# Altium PCB NeptuneSense_outdoor_station.PcbDoc
Units mm, origin at the board's own origin, x right, y up, seen from the top; angles counter-clockwise.
Board outline 67.06 x 79.25 mm, 2 copper layers (Top Layer, Bottom Layer); 79 components, 44 nets, 263 pads, 48 vias.
Unrouted connection lines stored in the file: 17.
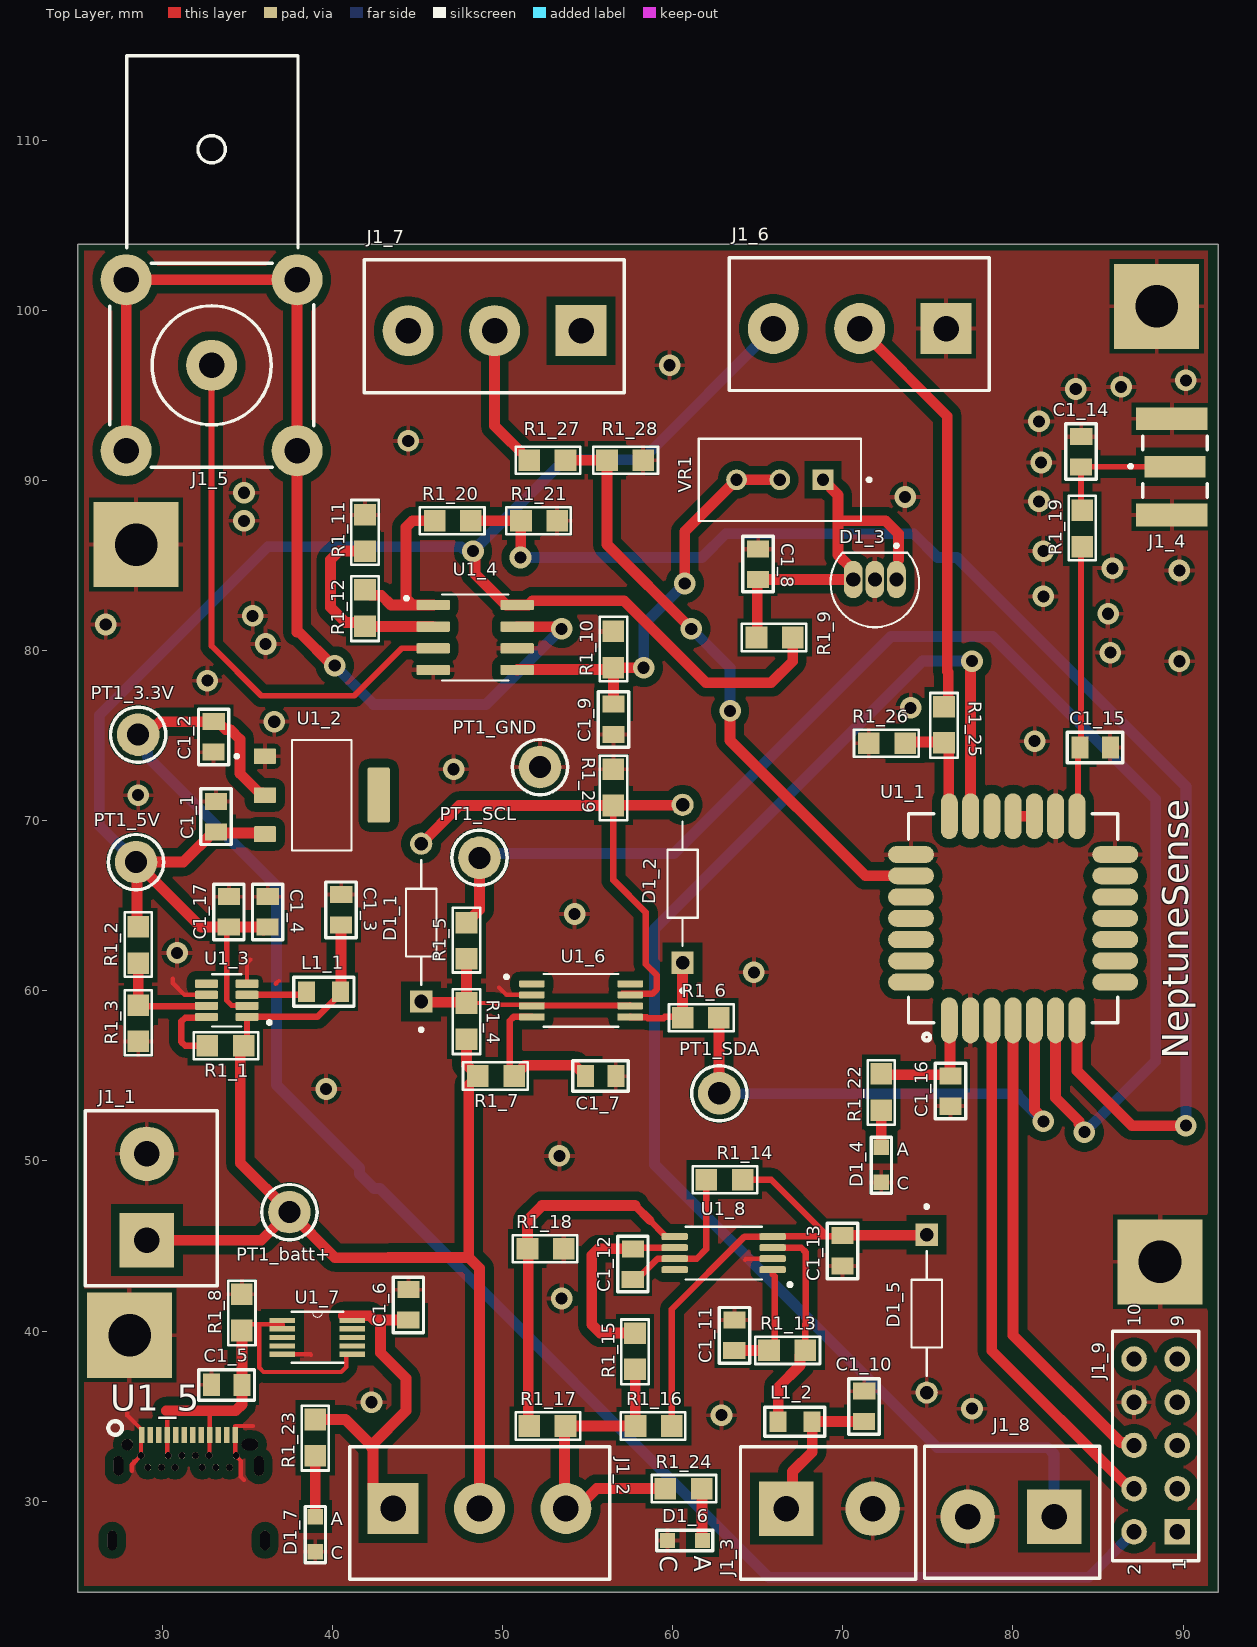
[diagram p0: Top Layer view]
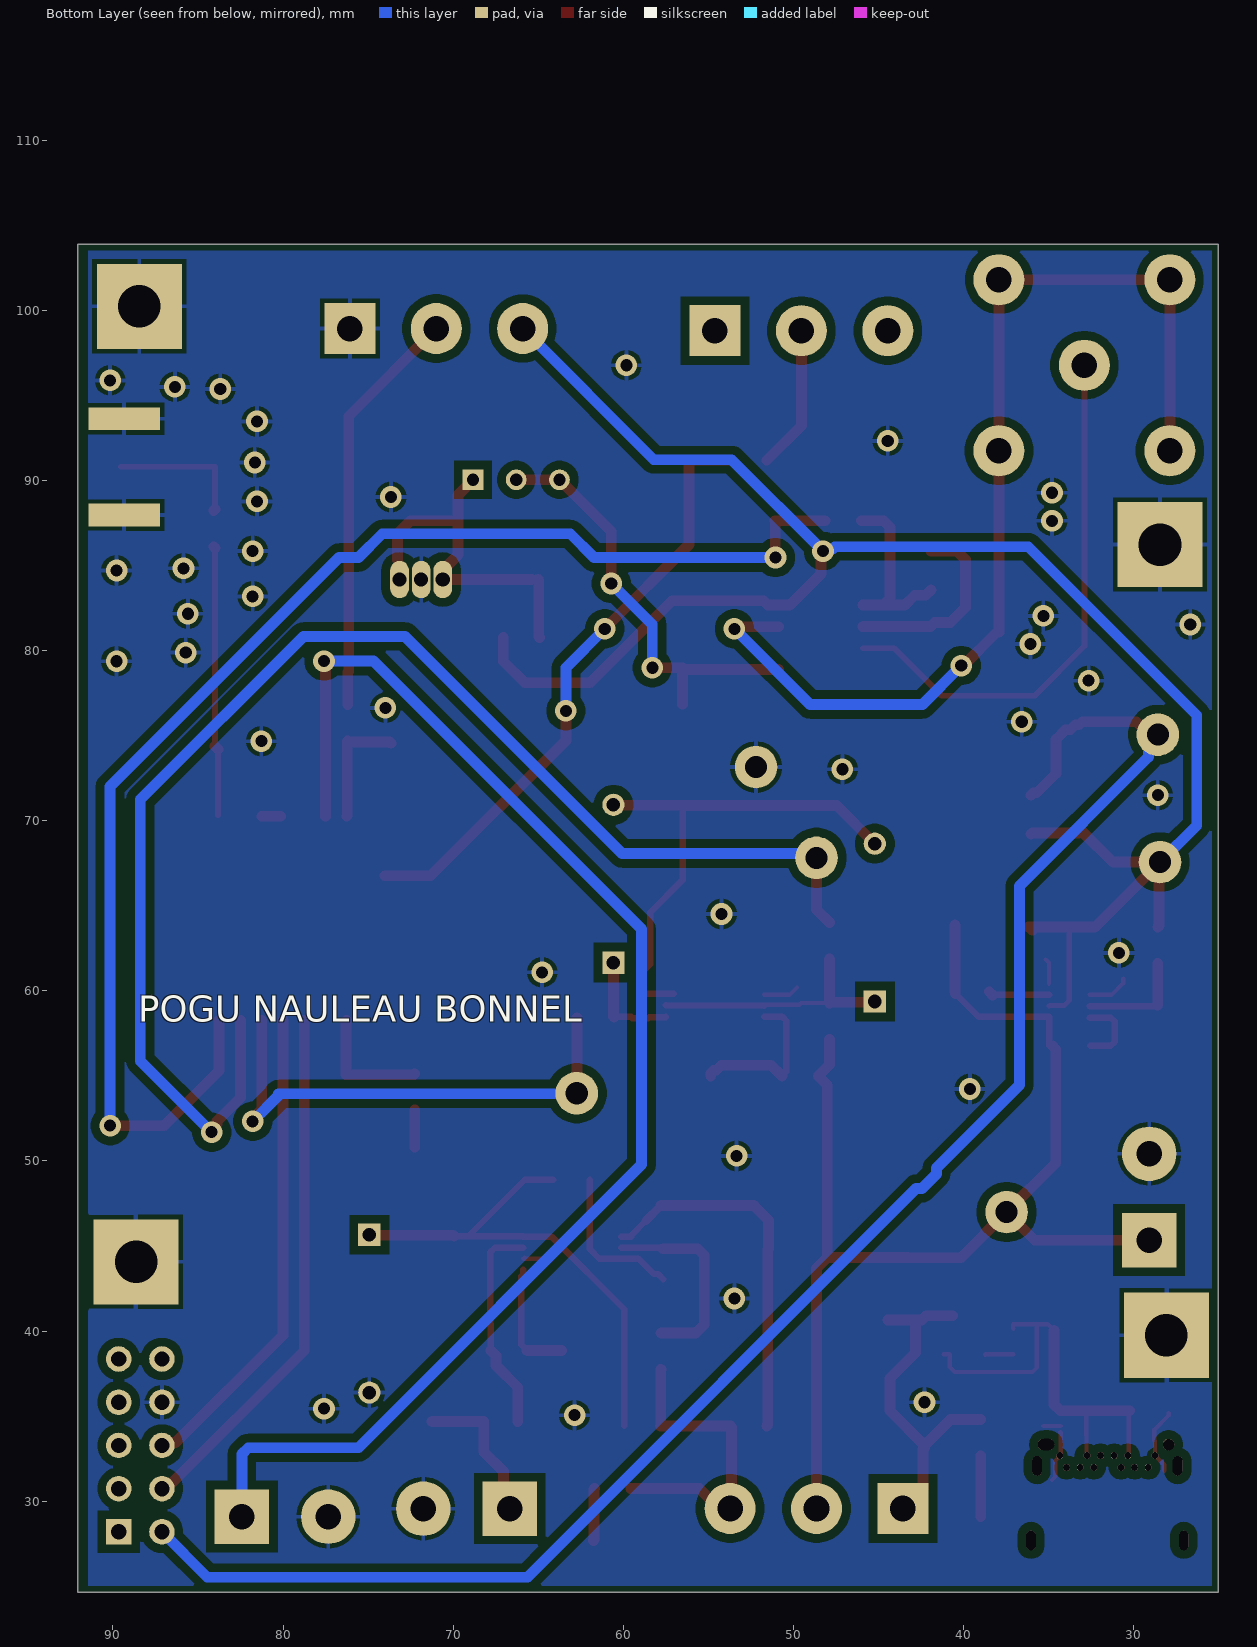
[diagram p1: Bottom Layer view, seen from below]
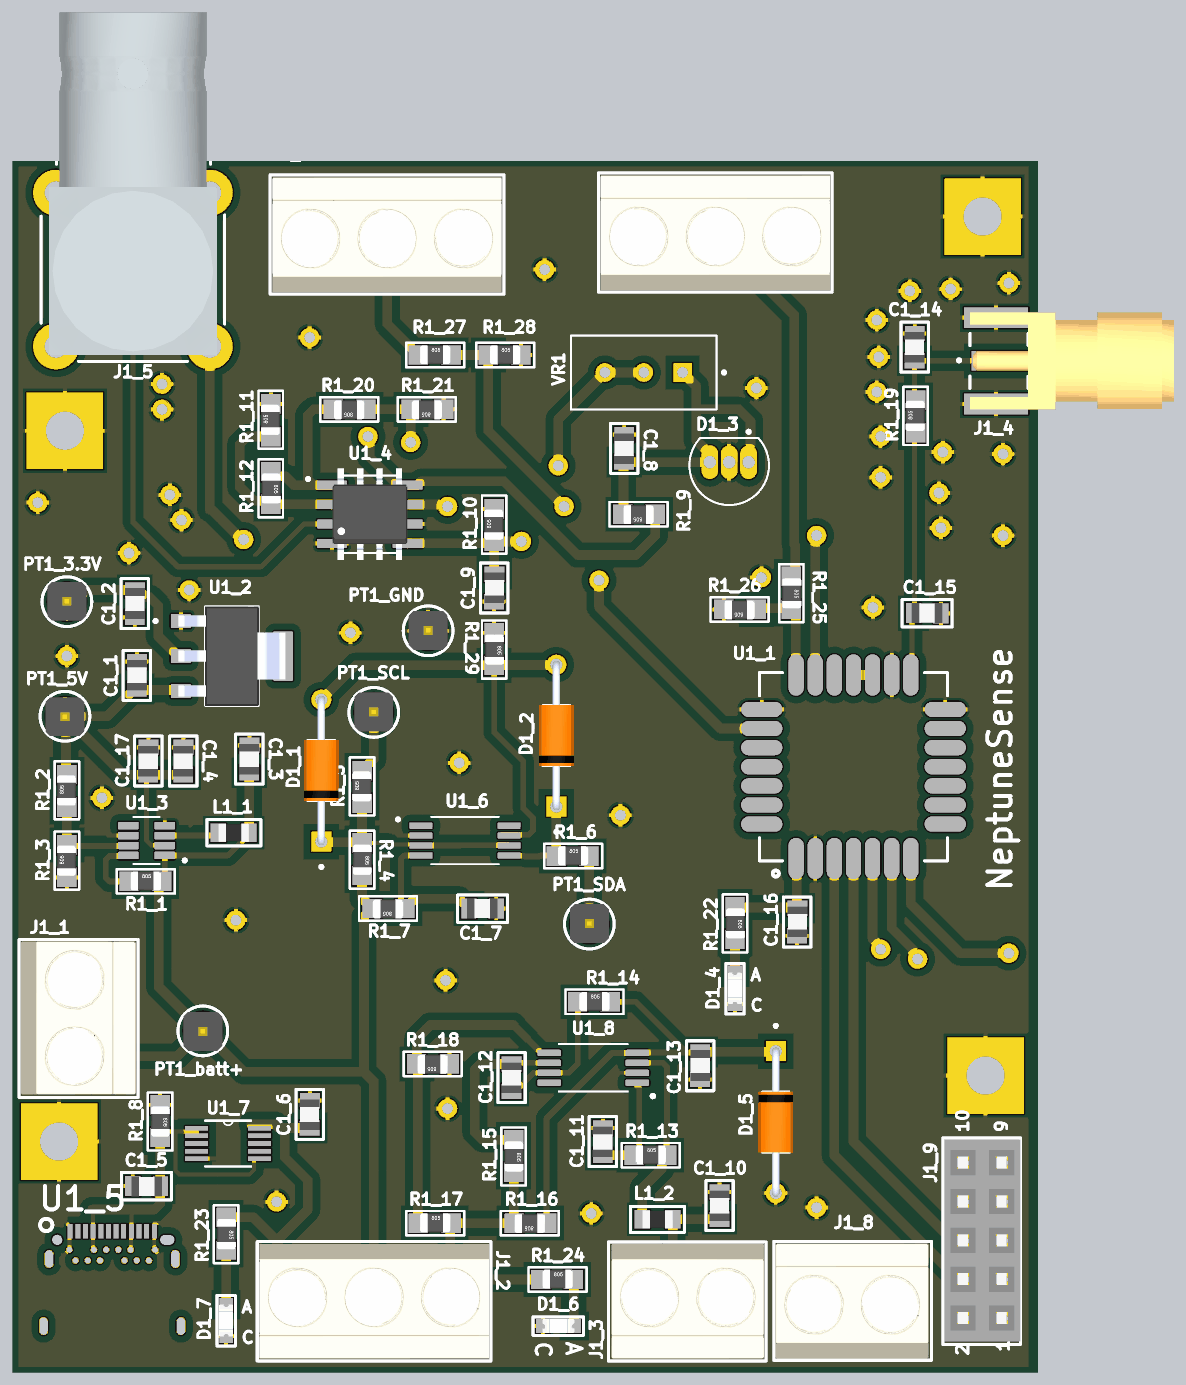
[diagram p2: 3D render of the assembled board from above, using the file's embedded part models]

## Layer stack, top to bottom
Top Solder: solder mask 0.0102, Solder Resist, Dk 3.5
Top Layer: signal copper 0.0356
Dielectric 1: dielectric 0.32, FR-4, Dk 4.8
Bottom Layer: signal copper 0.0356
Bottom Solder: solder mask 0.0102, Solder Resist, Dk 3.5

## Board outline
25.019,24.638 25.019,103.886 92.075,103.886 92.075,24.638

## Design rules (kind name [scope] priority, off if disabled: settings)
Clearance [All] p1: gap=0.505 ignorepadtopadclearanceinfootprint=FALSE except(0: Arc-Text Track-Text SMDPad-Text THPad-Text Via-Text Fill-Text Poly-Text Region-Text Text-Text Text-Hole; 0.15: Arc-SMDPad Arc-THPad Arc-Hole Track-SMDPad Track-THPad Track-Hole SMDPad-SMDPad SMDPad-THPad SMDPad-Hole THPad-THPad THPad-Hole Via-Hole Fill-Hole Poly-Hole Region-Hole; 0.254: Arc-Arc Arc-Track Arc-Via Track-Track Track-Via SMDPad-Via THPad-Via Via-Via)
PolygonConnect [All] p1: connectstyle=Relief reliefconductorwidth=0.254 reliefentries=4 polygonreliefangle="90 Angle" airgapwidth=0.254
RoutingVias [All] p1: holewidth=0.711 width=1.27 viastyle="Through Hole" minholewidth=0.711 minwidth=1.27 maxholewidth=0.711 maxwidth=1.27
SolderMaskExpansion [All] p1: expansion=0.102 istentingtop=FALSE
Width [All] p1: maxlimit=0.762 minlimit=0.254 preferedwidth=0.635
30 further rules are at their usual default settings.

## Components (designator, comment, footprint, x,y, rotation, side; value= is the part's Value field where it differs from the comment)
C1_1 "CMS_0805" CONDENSATEUR_CMS_0805 33.147,69.342 r90 top value=10µF
C1_2 "CMS_0805" CONDENSATEUR_CMS_0805 33.01,74.029 r90 top value=2µnF
C1_3 "CMS_0805" CONDENSATEUR_CMS_0805 40.513,65.659 r270 top value=10µF
C1_4 "CMS_0805" CONDENSATEUR_CMS_0805 36.195,65.532 r270 top value=10µF
C1_5 "CMS_0805" CONDENSATEUR_CMS_0805 32.881,36.84 r0 top value=1µF
C1_6 "CMS_0805" CONDENSATEUR_CMS_0805 44.46,42.43 r270 top value=1µF
C1_7 "CMS_0805" CONDENSATEUR_CMS_0805 56.654,54.981 r180 top value=0,1µF
C1_8 "CMS_0805" CONDENSATEUR_CMS_0805 65.024,85.979 r270 top value=0,1µF
C1_9 "CMS_0805" CONDENSATEUR_CMS_0805 56.515,75.057 r90 top value=0,1µF
C1_10 "CMS_0805" CONDENSATEUR_CMS_0805 71.257,36.461 r270 top value=10µF
C1_11 "CMS_0805" CONDENSATEUR_CMS_0805 63.627,40.64 r270 top value="100 nF"
C1_12 "CMS_0805" CONDENSATEUR_CMS_0805 57.658,44.831 r270 top value=1uF
C1_13 "CMS_0805" CONDENSATEUR_CMS_0805 69.977,43.815 r90 top value=4,7uF
C1_14 "CMS_0805" CONDENSATEUR_CMS_0805 84.015,92.595 r270 top net-tie value=DNF
C1_15 "CMS_0805" CONDENSATEUR_CMS_0805 85.725,74.295 r180 top value=DNF
C1_16 "CMS_0805" CONDENSATEUR_CMS_0805 76.327,53.213 r90 top value=4,7µF
C1_17 "CMS_0805" CONDENSATEUR_CMS_0805 33.909,65.532 r270 top value=1µF
D1_1 "BZX55C3V3" DIOAD928W47L399D179 45.212,64.008 r90 top
D1_2 "BZX55C3V3" DIOAD928W47L399D179 60.579,66.294 r90 top
D1_3 "TL431ILP" TO92127P520H660-3 71.882,83.566 r180 top
D1_4 "LED_CMS_0805" LED_CMS_0805 72.263,50.8 r0 top
D1_5 "BZX55C3V3" DIOAD928W47L399D179 74.93,41.021 r270 top
D1_6 "LED_CMS_0805" LED_CMS_0805 61.753,27.686 r270 top
D1_7 "LED_CMS_0805" LED_CMS_0805 38.989,29.083 r0 top
J1_1 "BORNIER2_DROIT_A VIS" BORNIER2_A_VIS 29.083,45.339 r90 top
J1_2 "BORNIER3_DROIT_A VIS" BORNIER3_A_VIS 43.561,29.565 r0 top
J1_3 "BORNIER2_DROIT_A VIS" BORNIER2_A_VIS 66.675,29.555 r0 top
J1_4 "SMA-J-P-H-ST-EM1" SAMTEC_SMA-J-P-H-ST-EM1 89.535,90.805 r90 top
J1_5 "BNC_COUDEE_CARREE_10.1" BNC_C_CAR_10.1 32.893,96.774 r0 top
J1_6 "BORNIER3_DROIT_A VIS" BORNIER3_A_VIS 76.073,98.933 r180 top
J1_7 "BORNIER3_DROIT_A VIS" BORNIER3_A_VIS 54.61,98.806 r180 top
J1_8 "BORNIER2_DROIT_A VIS" BORNIER2_A_VIS 82.423,29.083 r180 top
J1_9 "BARRETTE_5 CONTACTS_2 RANGEES_FEMELLE_DROITE" BARRETTE_5X2_F_D 89.662,28.194 r90 top
L1_1 "INDUCTANCE_CMS_0805" INDUCTANCE_CMS_0805 38.481,59.944 r0 top value=1µH
L1_2 "INDUCTANCE_CMS_0805" INDUCTANCE_CMS_0805 68.199,34.671 r180 top value=10µH
PT1_3.3V "POINT_TEST" POINT_TEST 28.575,75.057 r90 top
PT1_5V "POINT_TEST" POINT_TEST 28.448,67.564 r270 top
PT1_batt+ "POINT_TEST" POINT_TEST 37.465,46.99 r270 top
PT1_GND "POINT_TEST" POINT_TEST 52.197,73.152 r90 top
PT1_SCL "POINT_TEST" POINT_TEST 48.641,67.818 r90 top
PT1_SDA "POINT_TEST" POINT_TEST 62.738,53.975 r90 top
R1_1 "RESISTANCE_CMS_0805" RESISTANCE_CMS_0805 32.639,56.769 r0 top value=100K
R1_2 "RESISTANCE_CMS_0805" RESISTANCE_CMS_0805 28.575,61.62 r90 top value=1M
R1_3 "RESISTANCE_CMS_0805" RESISTANCE_CMS_0805 28.575,57.023 r90 top value=137K
R1_4 "RESISTANCE_CMS_0805" RESISTANCE_CMS_0805 47.879,59.284 r270 top value=1K
R1_5 "RESISTANCE_CMS_0805" RESISTANCE_CMS_0805 47.879,61.874 r90 top value=150
R1_6 "RESISTANCE_CMS_0805" RESISTANCE_CMS_0805 60.579,58.42 r0 top value=150
R1_7 "RESISTANCE_CMS_0805" RESISTANCE_CMS_0805 50.673,54.991 r180 top value=500
R1_8 "RESISTANCE_CMS_0805" RESISTANCE_CMS_0805 34.671,42.164 r270 top value=1K
R1_9 "RESISTANCE_CMS_0805" RESISTANCE_CMS_0805 67.056,80.772 r180 top value=1k
R1_10 "RESISTANCE_CMS_0805" RESISTANCE_CMS_0805 56.515,78.994 r90 top value=10k
R1_11 "RESISTANCE_CMS_0805" RESISTANCE_CMS_0805 41.91,85.852 r90 top value=10k
R1_12 "RESISTANCE_CMS_0805" RESISTANCE_CMS_0805 41.91,83.566 r270 top value=20k
R1_13 "RESISTANCE_CMS_0805" RESISTANCE_CMS_0805 65.659,38.862 r0 top value=1k
R1_14 "RESISTANCE_CMS_0805" RESISTANCE_CMS_0805 61.976,48.895 r0 top value=1k
R1_15 "RESISTANCE_CMS_0805" RESISTANCE_CMS_0805 57.785,39.878 r270 top value=1k
R1_16 "RESISTANCE_CMS_0805" RESISTANCE_CMS_0805 59.944,34.417 r180 top value=10m
R1_17 "RESISTANCE_CMS_0805" RESISTANCE_CMS_0805 51.562,34.417 r0 top value=1M
R1_18 "RESISTANCE_CMS_0805" RESISTANCE_CMS_0805 53.594,44.831 r180 top value=330k
R1_19 "RESISTANCE_CMS_0805" RESISTANCE_CMS_0805 84.074,86.106 r90 top value=0
R1_20 "RESISTANCE_CMS_0805" RESISTANCE_CMS_0805 48.133,87.63 r180 top value=1k
R1_21 "RESISTANCE_CMS_0805" RESISTANCE_CMS_0805 53.213,87.63 r180 top value=2k
R1_22 "RESISTANCE_CMS_0805" RESISTANCE_CMS_0805 72.263,55.118 r270 top value=3,3k
R1_23 "RESISTANCE_CMS_0805" RESISTANCE_CMS_0805 38.989,34.798 r270 top value=3,3k
R1_24 "RESISTANCE_CMS_0805" RESISTANCE_CMS_0805 59.563,30.734 r0 top value=3,3k
R1_25 "RESISTANCE_CMS_0805" RESISTANCE_CMS_0805 75.946,76.708 r270 top value=1k
R1_26 "RESISTANCE_CMS_0805" RESISTANCE_CMS_0805 73.66,74.549 r180 top value=2k
R1_27 "RESISTANCE_CMS_0805" RESISTANCE_CMS_0805 51.562,91.186 r0 top value=1k
R1_28 "RESISTANCE_CMS_0805" RESISTANCE_CMS_0805 56.134,91.186 r0 top value=2k
R1_29 "RESISTANCE_CMS_0805" RESISTANCE_CMS_0805 56.515,73.025 r270 top value=0.02
U1_1 "stm32" QFN127P600-8N 80.01,64.262 r90 top
U1_2 "AMS1117-3.3" SOT229P700X180-4N 39.37,71.501 r0 top
U1_3 "MP3414AGJ-Z" SOT65P280X100-8N 33.782,59.436 r180 top
U1_4 "TLC4502ID" SOIC127P599X175-8N 48.387,80.772 r0 top
U1_5 "USB" USB 31.541,25.156 r0 top
U1_6 "DS2782E+T&R" SOP65P640X110-8N 54.61,59.436 r0 top
U1_7 "MCP73833-GPI/UN" SOP50P490X110-10N 39.116,39.624 r0 top
U1_8 "SPV1040T" SOP65P640X120-8N 62.992,44.577 r180 top
VR1 "3296W1103LF" TRIM_3296W1103LF 66.294,90.043 r180 top

## Footprints (in the part's own frame and the unit in brackets; to place one, negate y for a bottom-side part, rotate by r counter-clockwise, add the part's x,y. Pads: shape width x height; smd on the part's side, far side on the other; paste and mask are expansions set on the pad)
BARRETTE_5X2_F_D [mm] "BARRETTE 5 CONTACTS ; 2 RANGEES ; DROITE ; FEMELLE ; ESPACEMENT BROCHES = 2.54 mm"
  rect 1.5x1.5 hole 0.9: 1(0,0)
  round 1.5 hole 0.9: 2(0,2.54) 3(2.54,0) 4(2.54,2.54) 5(5.08,0) 6(5.08,2.54) 7(7.62,0) 8(7.62,2.54) 9(10.16,0) 10(10.16,2.54)
  silkscreen extent -1.7,-1.27 11.8,3.81, body extent -1.5,-1.25 11.7,3.7, height 8.5
BNC_C_CAR_10.1 [mm] "EMBASE BNC CARREE ;  COUDEE ; 50R ; DIAMETRE = 9.7 mm ; ESPACEMENT BROCHES GND = 10.1 mm"
  round 3 hole 1.5: 1(0,0) 2(-5.025,-5.025) 2(-5.025,5.025) 2(5.025,-5.025) 2(5.025,5.025)
  silkscreen extent -6,-6 6,18.2, body extent -5.5,-5.6 5.5,16.8, height 18.65
BORNIER2_A_VIS [mm] "BORNIER 2 PLOTS A VIS ; VERTICAL ; ESPACEMENT BROCHES = 5.08mm"
  rect 3.2x3.2 hole 1.5: 1(0,0)
  round 3.2 hole 1.5: 2(5.08,0)
  silkscreen extent -2.69,-4.15 7.62,3.63, body extent -2.5,-4 7.5,3.5, height 10
BORNIER3_A_VIS [mm] "BORNIER 3 PLOTS A VIS ; VERTICAL ; ESPACEMENT BROCHES = 5.08mm"
  rect 3x3 hole 1.5: 1(0,0)
  round 3 hole 1.5: 2(5.08,0) 3(10.16,0)
  silkscreen extent -2.54,-4.16 12.74,3.64, body extent -2.4,-4 12.6,3.5, height 10
CONDENSATEUR_CMS_0805 [mm] "CONDENSATEUR CMS 0805 ; DIMENSIONS : 2mm x 1.25mm"
  rect 1x1.3 smd: 1(0,0) 2(1.79,-0.01)
  silkscreen extent -0.74,-0.9 2.53,0.89, body extent -0.09,-0.67 1.91,0.64, height 0.73
DIOAD928W47L399D179 [mm]
  round 1.308 hole 0.8: A(4.64,0)
  rect 1.308x1.308 / inner round 1.308 / far side rect 1.308x1.308 hole 0.8: C(-4.64,0)
  silkscreen extent -6.39,-0.89 3.67,0.89, body extent -4.87,-1.14 4.87,1.14, height 2.28
INDUCTANCE_CMS_0805 [mm] "INDUCTANCE CMS 0805 ; DIMENSIONS : 2mm x 1.25mm"
  rect 1x1.2 smd: 1(0,0) 2(2,0)
  silkscreen extent -0.75,-0.85 2.78,0.86, body extent 0,-0.6 2,0.6, height 0.95
LED_CMS_0805 [mm] "LED CMS 0805 ; DIMENSIONS : 2.0mm x 0.9mm"
  rect 0.9x0.9 smd: 1(0,0) 2(0,-2.063)
  silkscreen extent -0.6,-2.7 0.6,0.6, body extent -0.45,-2.06 0.45,0, height 0.85
POINT_TEST [mm] "PASTILLE TRAVERSANTE ; DIAMETRE = 2.5 mm ; DIAMETRE PERCAGE = 1.3 mm"
  round 2.5 hole 1.3: 1(0,0)
  silkscreen extent -1.62,-1.63 1.62,1.63, body extent -1.24,-1.27 1.3,1.27, height 5.94
QFN127P600-8N [mm]
  oval 2.7x1 smd mask+0.102: 1(-6,3.75)
  oval 2.7x1 smd: 2(-6,2.5) 3(-6,1.25) 4(-6,0) 5(-6,-1.25) 6(-6,-2.5) 7(-6,-3.75) 15(6,-3.75) 16(6,-2.5) 17(6,-1.25) 18(6,0) 19(6,1.25) 20(6,2.5) 21(6,3.75)
  oval 1x2.7 smd: 8(-3.75,-6) 9(-2.5,-6) 10(-1.25,-6) 11(0,-6) 12(1.25,-6) 13(2.5,-6) 14(3.75,-6) 22(3.75,6) 23(2.5,6) 24(1.25,6) 25(0,6) 26(-1.25,6) 27(-2.5,6) 28(-3.75,6)
  silkscreen extent -7.18,-6.15 6.15,6.15, body extent -6.57,-6.58 6.58,6.57, height 2.5
RESISTANCE_CMS_0805 [mil] "RESISTANCE CMS 0805 ; DIMENSIONS : 2mm x 1.25mm"
  rect 50x50 smd: 1(0,0) 2(84,0)
  silkscreen extent -31,-31 118,31, body extent 4,-24 83,26, height 31
SAMTEC_SMA-J-P-H-ST-EM1 [mm]
  rect 1.27x3.6 smd: 1(0,0)
  rect 1.35x4.2 smd: 2_1(-2.825,0.2) 3_1(2.825,0.2)
  rect 1.35x4.2 smd far side: 2_2(-2.825,0.2) 3_2(2.825,0.2)
  silkscreen extent -1.8,-1.9 1.8,2.72, body extent -3.17,-11.42 3.18,1.91, height 3.55
SOIC127P599X175-8N [mm]
  rrect25% 1.97x0.6 smd: 1(-2.47,1.905) 2(-2.47,0.635) 3(-2.47,-0.635) 4(-2.47,-1.905) 5(2.47,-1.905) 6(2.47,-0.635) 7(2.47,0.635) 8(2.47,1.905)
  silkscreen extent -4.14,-2.52 1.95,2.52, body extent -2.45,-3 2.45,3, height 1.75
SOP50P490X110-10N [mil]
  rect 59x12 smd: 1(-81,39) 2(-81,20) 3(-81,0) 4(-81,-20) 5(-81,-39) 6(81,-39) 7(81,-20) 8(81,0) 9(81,20) 10(81,39)
  silkscreen extent -59,-59 59,59
SOP65P640X110-8N [mm]
  rrect25% 1.5x0.41 smd: 1(-2.885,0.975) 2(-2.885,0.325) 3(-2.885,-0.325) 4(-2.885,-0.975) 5(2.885,-0.975) 6(2.885,-0.325) 7(2.885,0.325) 8(2.885,0.975)
  silkscreen extent -4.48,-1.55 2.2,1.55
SOP65P640X120-8N [mm]
  rrect50% 1.56x0.41 smd: 1(-2.88,0.975) 2(-2.88,0.325) 3(-2.88,-0.325) 4(-2.88,-0.975) 5(2.88,-0.975) 6(2.88,-0.325) 7(2.88,0.325) 8(2.88,0.975)
  silkscreen extent -4.01,-1.55 2.25,1.96
SOT65P280X100-8N [mm]
  rrect25% 1.34x0.49 smd: 1(-1.19,0.975) 2(-1.19,0.325) 3(-1.19,-0.325) 4(-1.19,-0.975) 5(1.19,-0.975) 6(1.19,-0.325) 7(1.19,0.325) 8(1.19,0.975)
  silkscreen extent -2.6,-1.54 0.85,1.54
SOT229P700X180-4N [mm]
  rrect15% 1.31x0.93 smd: 1(-3.345,2.29) 2(-3.345,0) 3(-3.345,-2.29)
  rrect15% 1.31x3.24 smd: 4(3.345,0)
  silkscreen extent -5.1,-3.25 1.75,3.25, body extent -3.5,-3.25 3.5,3.25, height 1.8
TO92127P520H660-3 [mm]
  oval 1.1x2.2 hole 0.83: 1(-1.27,-0.612) 2(0,-0.612) 3(1.27,-0.612)
  silkscreen extent -2.6,-2.7 2.6,2.19
TRIM_3296W1103LF [mm]
  rect 1.218x1.218 hole 0.71: 1(-2.54,0)
  round 1.218 hole 0.71: 2(0,0) 3(2.54,0)
  silkscreen extent -5.35,-2.41 4.76,2.42
USB [mm]
  oval 0.55x1.15 hole 0.55 slot 1.15 at 90 deg: "\""(4.49,2.53) S1(-4.13,6.92) S2(4.13,6.92) S4(-4.49,2.53)
  rect 0.33x0.93 smd: A1(-2.75,8.73) A2(-2.25,8.73) A3(-1.75,8.73) A4(-1.25,8.73) A5(-0.75,8.73) A6(-0.25,8.73) A7(0.25,8.73) A8(0.75,8.73) A9(1.25,8.73) A10(1.75,8.73) A11(2.25,8.73) A12(2.75,8.73)
  round 0.4 hole 0.4: B1(2.8,7.52) B2(2.4,6.82) B3(1.6,6.82) B4(1.2,7.52) B5(0.8,6.82) B6(0.4,7.52) B7(-0.4,7.52) B8(-0.8,6.82) B9(-1.2,7.52) B10(-1.6,6.82) B11(-2.4,6.82) B12(-2.8,7.52)
  round 0.675 hole 0.675 unplated: ""(-3.6,8.17)
  oval 0.955x0.653 hole 0.653 slot 0.955 at 0 deg unplated: ""(3.6,8.17)
  silkscreen extent -4.72,8.74 -3.92,9.55, body extent -4.84,-0.09 4.84,9.83, height 3.21

## Part data
C1_1 C1_2 C1_3 C1_4 C1_5 C1_6 C1_7 C1_8 C1_9 C1_10 C1_11 C1_12 C1_13 C1_14 C1_15 C1_16 C1_17: library part CONDENSATEUR_CMS_CER_0805, "CONDENSATEUR CMS CERAMIQUE 0805", Type=CMS_0805
D1_1 D1_2 D1_5: library part CMP-177-000000-1, "Zener Diode Single 3.3V 5% 85Ohm 500mW 2-Pin DO-35 T/R", Package="DO-35-2 Taiwan Semiconductor", Check_prices=https://www.snapeda.com/parts/BZX55C3V3/Taiwan+Semiconductor/view-part/?ref=eda, Component Type=Standard, Design Item ID=BZX55C3V3, MF="Taiwan Semiconductor", MP=BZX55C3V3, Pin Count=2, SnapEDA_Link=https://www.snapeda.com/parts/BZX55C3V3/Taiwan+Semiconductor/view-part/?ref=snap, Source=BZX55C3V3.SchLib
D1_3: library part CMP-170-000000-1, "Ic, Tl431ilp, Tl431, Tl431a, Tl4 31b, Tl432, Tl432a, Tl432b<Nv", Package=None, Availability=Unavailable, Component Type=Standard, Design Item ID=TL431ILP, MP=TL431ILP, Pin Count=3, Price=None, Source=TL431ILP.SchLib
D1_4 D1_6 D1_7: "LED CMS 0805", Type=CMS_0805
J1_1 J1_3 J1_8: library part CMP-118-000038-1, "BORNIER 2 PLOTS DROIT A VIS 5.08mm", Design Item ID="BORNIER2_DROIT_A VIS", Source=connecteurs.SchLib, Type=BORNIER2_D
J1_2 J1_6 J1_7: library part CMP-118-000178-1, "BORNIER 3 PLOTS DROIT A VIS 5.08mm", Design Item ID="BORNIER3_DROIT_A VIS", Source=connecteurs.SchLib, Type=BORNIER3_D
J1_4: library part CMP-200-000000-1, "SMA Connector Jack, Female Socket 50Ohm Board Edge, End Launch Solder", Package=None, Availability=Unavailable, Component Type=Standard, Design Item ID=SMA-J-P-H-ST-EM1, MF=Samtec, MP=SMA-J-P-H-ST-EM1, Pin Count=5, Price=None, Source=SMA-J-P-H-ST-EM1.SchLib
J1_5: library part CMP-118-000188-1, "EMBASE BNC COUDEE CARREE 50r - ESPACEMENT BROCHES GND=10.1", Design Item ID=BNC_COUDEE_CARREE_10.1, Source=connecteurs.SchLib, Type=BNC_C_CAR_10.1
J1_9: "BARRETTE 5 CONTACTS 2 RANGEES FEMELLE DROITE", Type=F_D_5X2
L1_1 L1_2: "INDUCTANCE CMS 0805", Type=CMS_0805
PT1_3.3V PT1_5V PT1_batt+ PT1_GND PT1_SCL PT1_SDA: library part CMP-118-000011-1, "POINT TEST", Design Item ID=POINT_TEST, Source=connecteurs.SchLib
R1_1 R1_2 R1_3 R1_4 R1_5 R1_6 R1_7 R1_8 R1_9 R1_10 R1_11 R1_12 R1_13 R1_14 R1_15 R1_16 R1_17 R1_18 R1_19 R1_20 R1_21 R1_22 R1_23 R1_24 R1_25 R1_26 R1_27 R1_28 R1_29: "RESISTANCE CMS 0805", Type=CMS_0805
U1_2: library part CMP-154-000000-1, "LDO Voltage Regulators 800MA LDO LINEAR REG", Package="SOT-223 Seeed Technology", Availability="In Stock", Component Type=Standard, Design Item ID=AMS1117-3.3, MF="ams AG", MP=AMS1117-3.3, Pin Count=3, Price=None, Purchase-URL=https://pricing.snapeda.com/search/part/AMS1117-3.3/?ref=eda, SnapEDA_Link=https://www.snapeda.com/parts/AMS1117-3.3/AMS+AG/view-part/?ref=snap, Source=AMS1117-3.3.SchLib
U1_3: library part CMP-156-000001-1, "Boost Switching Regulator IC Positive Adjustable 2V 1 Output 3A SOT-23-8", Package="TSOT-23 MPS", Availability=Unavailable, Component Type=Standard, Design Item ID=MP3414AGJ-Z, MF="Monolithic Power", MP=MP3414AGJ-Z, Pin Count=8, Price=None, SnapEDA_Link=https://www.snapeda.com/parts/MP3414AGJ-Z/Monolithic%20Power%20Systems%20Inc./view-part/1062936/?ref=snap, Source=SnapEDAsch.SchLib
U1_4: library part CMP-172-000000-1, "Advanced LinEPIC Self-Calibrating Precision Dual Operational Amplifier 8-SOIC -40 to 125", Package="SOIC-8 Texas Instruments", Availability=Warning, Check_prices=https://www.snapeda.com/parts/TLC4502ID/Texas%20Instruments/view-part/1176387/?ref=eda, Component Type=Standard, Design Item ID=TLC4502ID, MF="Texas Instruments", MP=TLC4502ID, Pin Count=8, Price=None, Purchase-URL=https://pricing.snapeda.com/search/part/TLC4502ID/?ref=eda, SnapEDA_Link=https://www.snapeda.com/parts/TLC4502ID/Texas%20Instruments/view-part/1176387/?ref=snap, Source=TLC4502ID.SchLib
U1_6: library part CMP-168-000000-1, "Power Management IC Development Tools DS2782 EVAL KIT", Package="TSSOP-8 Maxim Integrated", Availability="In Stock", Check_prices=https://www.snapeda.com/parts/DS2782E+T/Maxim+Integrated/view-part/?ref=eda, Component Type=Standard, Design Item ID=DS2782E+T&R, MF="Maxim Integrated", MP=DS2782E+T, Pin Count=7, Price=None, Purchase-URL=https://pricing.snapeda.com/search/part/DS2782E+T/?ref=eda, SnapEDA_Link=https://www.snapeda.com/parts/DS2782E+T/Maxim+Integrated/view-part/?ref=snap, Source=DS2782E+T&R.SchLib
U1_7: library part CMP-188-000000-1, "Charger IC Lithium Ion/Polymer 10-MSOP", Package="MSOP-10 Microchip", Component Type=Standard, Design Item ID=MCP73833-GPI/UN, Digi-Key_Part_Number=MCP73833-GPI/UN-ND, Digi-Key_Purchase_URL=https://www.digikey.rs/product-detail/en/microchip-technology/MCP73833-GPI-UN/MCP73833-GPI-UN-ND/1626620?utm_source=snapeda&utm_medium=aggregator&utm_campaign=symbol, MF=Microchip, MP=MCP73833-GPI/UN, Pin Count=10, SnapEDA_Link=https://www.snapeda.com/parts/MCP73833-GPI/UN/Microchip/view-part/526145/?ref=snap, Source=SnapEDAsch.SchLib
U1_8: library part CMP-190-000000-1, "IC BATTERY CHARGER SOLAR 8TSSOP", Package="TSSOP-8 STMicroelectronics", Availability=Unavailable, Component Type=Standard, Design Item ID=SPV1040T, MF=STMicroelectronics, MP=SPV1040T, Pin Count=8, Price=None, SnapEDA_Link=https://www.snapeda.com/parts/SPV1040T/STMicroelectronics/view-part/480076/?ref=snap, Source=SnapEDAsch.SchLib
VR1: library part CMP-179-000000-1, "Trimmer, Potentiometer 10kohm 25turn Thd", Package=None, Availability=Unavailable, Check_prices=https://www.snapeda.com/parts/3296W1103LF/Bourns/view-part/2487625/?ref=eda, Component Type=Standard, Design Item ID=3296W1103LF, MF=Bourns, MP=3296W1103LF, Pin Count=3, Price=None, SnapEDA_Link=https://www.snapeda.com/parts/3296W1103LF/Bourns/view-part/2487625/?ref=snap, Source=3296W1103LF.SchLib

## Free pads (board coordinates)
  rect 5x5 hole 2.5: 7(28.448,86.233) 8(88.453,100.241) 9(88.646,44.069) 10(28.067,39.751)

## Via types
v1: diameter 1.27, hole 0.711, Top Layer to Bottom Layer, 48 vias

## Nets (pads, with @x,y where several pads share a name; then routed paths per layer and width w, separated by ;. In a path a pad name is that pad's centre, name@x,y a point inside that pad or via, vN(x,y) a via of type N, cw(c..) or ccw(c..) an arc to the next point about the centre after c; other vN are vias at no path point)
3V3: C1_16.2 R1_22.1 U1_1.1 | length 7.3
  Top Layer w0.635: R1_22.1 72.321,55.06 76.279,55.06 76.298,55.079 76.298,58.224 U1_1.1
+3.3V: C1_2.2 J1_9.2 PT1_3.3V.1 U1_2.2 | length 98.4
  Top Layer w0.635: PT1_3.3V.1 29.08,75.057 29.842,75.819 C1_2.2 33.203,75.636 33.434,75.636 33.724,75.347 33.999,75.347 34.553,74.793 34.553,72.783 35.688,71.649 35.877,71.649 U1_2.2
  Bottom Layer w0.635: PT1_3.3V.1 28.575,74.552 29.116,74.011 29.116,73.754 36.703,66.167 36.703,54.46 41.581,49.581 41.581,49.233 42.443,48.371 42.791,48.371 65.636,25.527 79.258,25.527 79.263,25.522 81.265,25.522 81.27,25.527 84.455,25.527 J1_9.2
+5V: C1_1.1 C1_4.2 C1_17.2 J1_6.3 PT1_5V.1 R1_2.2 R1_9.1 U1_2.3 U1_3.2 U1_4.8 | length 110.8
  Top Layer w0.305: C1_17.2@33.782,63.5 33.782,59.435 34.081,59.136 34.947,59.136 U1_3.2
  Top Layer w0.635: R1_2.2 28.511,63.817 PT1_5V.1@28.511,67.501 ; C1_17.2@33.909,63.732 C1_17.2 ; C1_4.2@35.941,63.559 C1_4.2@36.124,63.742 ; U1_2.3 35.96,69.276 33.213,69.276 C1_1.1 32.997,69.342 31.219,67.564 PT1_5V.1 PT1_5V.1@28.511,67.501 ; C1_4.2 C1_4.2@36.124,63.742 ; v1(48.26,85.852) 48.382,85.73 48.382,84.502 50.207,82.677 51.507,82.677 51.761,82.931 57.138,82.931 61.964,78.105 65.786,78.105 67.056,79.375 R1_9.1 ; PT1_5V.1@28.511,67.501 32.27,63.742 C1_17.2 ; C1_17.2 C1_4.2@36.124,63.742
  Bottom Layer w0.635: PT1_5V.1 26.289,69.723 26.289,76.2 36.195,86.106 47.571,86.106 47.703,85.974 48.138,85.974 v1(48.26,85.852) 53.632,91.224 58.204,91.224 J1_6.3
+BAT: C1_3.2 J1_1.1 J1_2.2 L1_1.2 PT1_batt+.1 R1_1.2 R1_4.2 R1_7.2 U1_3.1 | length 71.9
  Top Layer w0.381: R1_1.2@34.972,56.769 U1_3.1 39.098,58.461 L1_1.2@40.481,59.844
  Top Layer w0.635: J1_1.1 35.814,45.339 PT1_batt+.1 ; R1_1.2 34.573,56.57 34.573,49.882 PT1_batt+.1 ; L1_1.2@40.481,59.844 L1_1.2 40.492,59.955 40.492,63.858 C1_3.2 ; R1_4.2 47.879,55.651 R1_7.2 48.006,54.458 48.006,44.323 ; J1_2.2 48.641,43.688 48.006,44.323 ; PT1_batt+.1 40.144,44.311 43.297,44.311 43.309,44.323 48.006,44.323
+CBAT: C1_6.2 J1_2.1 R1_23.1 U1_7.10 | length 20.9
  Top Layer w0.635: R1_23.1 40.767,34.798 42.291,33.274 ; 40.64,40.894 42.208,40.894 42.462,40.64 42.824,40.64 ; J1_2.1 42.379,30.748 42.379,33.059 42.291,33.147 42.291,33.274 ; C1_6.2 42.824,40.64 ; 42.291,33.274 44.323,35.306 44.323,37.224 42.824,38.722 42.824,40.64
BP: J1_8.1 U1_1.20 | length 82.4
  Top Layer w0.635: U1_1.20 77.51,79.296 v1(77.597,79.383)
  Bottom Layer w0.635: v1(77.597,79.383) 74.684,79.383 58.928,63.627 58.928,49.784 75.572,33.14 82.051,33.14 82.423,32.768 J1_8.1
FB: R1_2.1 R1_3.2 U1_3.7 | length 6.5
  Top Layer w0.381: R1_3.2 28.652,59.08 U1_3.7@32.592,59.08
  Top Layer w0.635: R1_3.2 R1_2.1
GND: C1_1.2 C1_2.1 C1_3.1 C1_4.1 C1_5.1 C1_6.1 C1_7.1 C1_8.1 C1_9.1 C1_10.1 C1_11.1 C1_13.1 C1_14.1 C1_15.1 C1_16.1 C1_17.1 D1_3.2 D1_4.2 D1_5.A D1_6.2 D1_7.2 J1_1.2 J1_3.2 J1_4.2_1 J1_4.2_2 J1_4.3_1 J1_4.3_2 J1_6.1 J1_8.2 J1_9.8 pad.7 pad.8 pad.9 pad.10 PT1_GND.1 R1_3.1 R1_8.1 R1_10.2 R1_11.2 R1_18.1 R1_21.1 R1_26.2 R1_28.2 R1_29.1 U1_1.2 U1_1.14 U1_1.16 U1_1.22 U1_2.1 U1_3.4 U1_3.6 U1_4.4 U1_4.6 U1_5.A1 U1_5.A12 U1_5.B1 U1_5.B12 U1_6.2 U1_7.5 U1_8.2 | length 17.9
  Top Layer w0.254: 27.94,35.179 27.94,35.037 28.791,34.186 U1_5.A1 28.791,33.586 28.741,33.536 U1_5.B12 28.197,32.132 28.197,31.776 ; 30.607,60.706 30.607,60.452 31.298,59.761 U1_3.6 ; 34.29,34.417 35.306,34.417 ; U1_5.A12@34.312,34.058 34.291,34.037 34.291,32.829 34.313,32.807 34.313,32.704 U1_5.B1 34.341,32.636 34.598,32.38 34.598,31.442 34.798,31.242 ; U1_3.4 34.972,61.642 35.168,61.838 ; 36.662,60.411 36.83,60.579 ; U1_7.5 38.71,38.633 38.735,38.608 ; 49.784,60.198 50.221,59.761 U1_6.2 ; 64.262,44.196 64.318,44.252 U1_8.2 U1_8.2@65.801,44.323
  other v1: 62.865,35.052 77.597,35.433 42.291,35.814 53.467,41.91 53.34,50.292 39.624,54.229 64.77,61.087 30.861,62.23 54.229,64.516 28.575,71.501 47.117,73.025 81.28,74.676 36.576,75.819 73.989,76.633 32.639,78.232 89.789,79.375 85.725,79.883 36.068,80.391 26.67,81.534 35.306,82.042 85.598,82.169 81.788,83.185 89.789,84.709 85.852,84.836 81.788,85.852 34.798,87.63 81.534,88.773 73.66,89.027 34.798,89.281 81.661,91.059 44.45,92.329 81.534,93.472 83.693,95.377 86.36,95.504 90.17,95.885 59.817,96.774
IN2: C1_9.2 R1_10.1 U1_4.5 VR1.2 VR1.3 | length 25.5
  Top Layer w0.635: U1_4.5 50.875,78.885 56.406,78.885 R1_10.1 ; C1_9.2 56.52,76.852 56.52,78.989 R1_10.1 ; v1(58.293,78.994) R1_10.1 ; v1(60.706,83.947) 60.706,86.995 VR1.3 VR1.2
  Bottom Layer w0.635: v1(58.293,78.994) 58.293,81.534 v1(60.706,83.947)
NetC1_7_2: C1_7.2 R1_7.1 U1_6.4 | length 9.6
  Top Layer w0.381: R1_7.1 50.419,55.245 50.419,58.238 50.642,58.461 U1_6.4
  Top Layer w0.635: R1_7.1 51.308,55.626 54.229,55.626 54.531,55.324 54.681,55.324 54.864,55.141 C1_7.2
NetC1_8_2: C1_8.2 D1_3.1 D1_3.3 R1_9.2 VR1.1 | length 20.9
  Top Layer w0.635: R1_9.2 64.968,80.818 64.968,84.143 C1_8.2 ; C1_8.2@65.407,84.178 D1_3.3 ; VR1.1 69.723,89.154 69.723,87.63 ; D1_3.3@70.701,84.089 D1_3.3 ; D1_3.1@73.063,84.089 D1_3.1 ; 73.279,85.344 73.279,86.868 72.517,87.63 69.723,87.63 ; 69.723,87.63 69.723,85.617 70.46,84.88 70.46,84.33 D1_3.3
NetC1_11_2: C1_11.2 R1_13.1 U1_8.1 | length 7
  Top Layer w0.381: R1_13.1 66,39.203 66,43.22 65.872,43.348 U1_8.1 U1_8.1@65.887,43.587
  Top Layer w0.635: C1_11.2@63.629,38.862 R1_13.1
NetC1_12_1: C1_12.1 R1_15.1 U1_8.6 | length 11.8
  Top Layer w0.381: C1_12.1@57.729,44.902 U1_8.6
  Top Layer w0.635: C1_12.1 55.617,44.831 55.245,44.459 55.245,40.377 55.744,39.878 R1_15.1
NetC1_12_2: C1_12.2 R1_14.1 U1_8.7 | length 9.1
  Top Layer w0.381: C1_12.2 57.958,43.351 58.21,43.351 59.111,44.252 61.412,44.252 61.976,44.816 R1_14.1
NetC1_13_2: C1_13.2 D1_5.C R1_14.2 R1_16.1 U1_8.4 | length 29.8
  Top Layer w0.381: R1_16.1 59.944,41.275 64.221,45.552 U1_8.4 ; R1_14.2 65.786,48.895 68.961,45.72 ; U1_8.4@65.898,45.578 C1_13.2@69.961,45.578
  Top Layer w0.635: C1_13.2@69.961,45.578 C1_13.2 70.015,45.633 74.902,45.633 D1_5.C
NetC1_14_2: C1_14.2 J1_4.1 R1_19.2 | length 8.1
  Top Layer w0.342: R1_19.2@84.005,88.308 C1_14.2 J1_4.1
  Top Layer w0.635: R1_19.2@84.005,88.308 R1_19.2
NetC1_15_2: C1_15.2 R1_19.1 U1_1.15 | length 15.8
  Top Layer w0.342: U1_1.15@83.83,70.332 C1_15.2@83.83,74.2 ; C1_15.2@84.005,74.374 R1_19.1@84.005,85.979
  Top Layer w0.635: C1_15.2@83.83,74.2 C1_15.2 C1_15.2@84.005,74.374 ; R1_19.1@84.005,86.037 R1_19.1
NetD1_1_A: D1_1.A D1_2.A R1_29.2 U1_6.7 | length 30.3
  Top Layer w0.381: R1_29.2 56.515,66.509 58.42,64.604 58.42,61.567 59.062,60.925 59.062,60.078 58.801,59.817 U1_6.7@57.023,59.817
  Top Layer w0.635: D1_1.A 47.455,70.891 R1_29.2 56.536,70.913 60.558,70.913 D1_2.A
NetD1_1_C: D1_1.C R1_4.1 R1_5.1 U1_6.3 U1_6.6 | length 16.4
  Top Layer w0.254: R1_4.1 49.555,59.284 49.657,59.182 53.213,59.182
  Top Layer w0.381: U1_6.3 U1_6.6@57.495,59.138
  Top Layer w0.635: D1_1.C 45.254,59.326 47.837,59.326 R1_4.1 R1_5.1
NetD1_2_C: D1_2.C R1_6.1 U1_6.5 | length 6.3
  Top Layer w0.381: U1_6.5 57.51,58.446 58.474,58.446 58.537,58.384 59.465,58.384 59.542,58.461 R1_6.1@60.538,58.461
  Top Layer w0.635: R1_6.1@60.538,58.461 60.579,58.502 D1_2.C
NetD1_4_1: D1_4.1 R1_22.2 | length 2.2
  Top Layer w0.635: D1_4.1 R1_22.2
NetD1_6_1: D1_6.1 R1_24.2 | length 3.1
  Top Layer w0.635: R1_24.2 61.725,30.706 61.725,27.714 D1_6.1
NetD1_7_1: D1_7.1 R1_23.2 | length 3.6
  Top Layer w0.635: D1_7.1 R1_23.2
NetJ1_6_2: J1_6.2 R1_25.1 | length 24.3
  Top Layer w0.635: J1_6.2 76.145,93.781 76.145,78.781 76.2,78.726 R1_25.1@76.2,76.835
NetJ1_7_2: J1_7.2 R1_27.1 | length 8.5
  Top Layer w0.635: J1_7.2 49.53,93.218 R1_27.1
NetL1_1_1: L1_1.1 U1_3.3 | length 3.6
  Top Layer w0.381: U1_3.3 L1_1.1@38.298,59.761
  Top Layer w0.635: L1_1.1@38.298,59.761 L1_1.1
NetL1_2_2: L1_2.2 R1_13.2 U1_8.3 | length 12.7
  Top Layer w0.381: U1_8.3 67.55,44.902 67.81,44.642 67.81,40.402 67.793,40.385 R1_13.2
  Top Layer w0.635: L1_2.2 66.199,36.696 67.475,37.973 67.475,38.544 R1_13.2
NetR1_1_1: R1_1.1 U1_3.8 | length 4.3
  Top Layer w0.381: R1_1.1@32.555,56.769 31.338,56.769 31.115,56.992 31.115,58.197 31.338,58.42 U1_3.8@32.592,58.42
NetR1_11_1: R1_11.1 R1_12.2 U1_4.2 | length 11.5
  Top Layer w0.635: R1_11.1 40.386,85.852 39.878,85.344 39.878,82.55 40.779,81.649 41.694,81.649 41.923,81.42 45.904,81.42 U1_4.2
NetR1_12_1: R1_12.1 R1_20.2 U1_4.1 | length 10.9
  Top Layer w0.635: R1_12.1 42.227,83.248 42.862,83.248 43.434,82.677 44.45,82.677 44.704,82.677 ; U1_4.1 44.704,82.677 ; R1_20.2 44.704,87.63 44.323,87.249 44.323,83.058 44.704,82.677
NetR1_17_1: R1_17.1 R1_18.2 U1_8.5 | length 21.9
  Top Layer w0.381: 58.674,46.482 59.522,45.634 59.522,45.567 59.537,45.552 U1_8.5
  Top Layer w0.508: 57.785,47.371 58.674,46.482
  Top Layer w0.635: R1_17.1 51.511,34.468 51.511,44.78 R1_18.2 51.46,46.507 52.324,47.371 57.785,47.371
NetU1_1_17: U1_1.17 U1_1.18 | length 1.1
  Top Layer w0.635: U1_1.18@80.137,70.262 U1_1.17
P_OUT: R1_20.1 R1_21.2 U1_1.7 | length 81.6
  Top Layer w0.635: R1_20.1 R1_21.2 51.067,87.617 51.067,85.484 v1(51.054,85.471) ; U1_1.7 83.76,55.305 86.995,52.07 v1(90.17,52.07)
  Bottom Layer w0.635: v1(51.054,85.471) 61.722,85.471 63.119,86.868 74.168,86.868 75.565,85.471 76.708,85.471 90.17,72.009 v1(90.17,52.07)
PH+: J1_5.1 U1_4.3 | length 31.9
  Top Layer w0.342: J1_5.1 32.893,80.264 35.814,77.343 41.275,77.343 44.069,80.137 U1_4.3
PH-: J1_5.2 U1_4.7 | length 62.5
  Top Layer w0.635: J1_5.2@28.05,91.567 27.868,91.749 27.868,101.799 37.918,101.799 37.918,91.749 J1_5.2@37.736,91.567 ; J1_5.2@37.918,91.131 37.918,81.081 38.045,81.081 40.005,79.121 v1(40.132,79.121) ; U1_4.7 52.914,81.407 52.92,81.402 53.345,81.402 v1(53.467,81.28)
  Bottom Layer w0.635: v1(40.132,79.121) 42.418,76.835 49.022,76.835 v1(53.467,81.28)
SCL: PT1_SCL.1 R1_5.2 U1_1.6 | length 80.3
  Top Layer w0.635: R1_5.2 48.641,64.77 PT1_SCL.1@48.641,66.805 ; U1_1.6 82.51,53.708 83.883,52.335 83.883,52.178 84.201,51.861 v1(84.201,51.689)
  Bottom Layer w0.635: PT1_SCL.1@49.022,68.072 60.071,68.072 72.834,80.835 78.804,80.835 88.392,71.247 88.392,55.88 v1(84.201,51.689)
SDA: PT1_SDA.1 R1_6.2 U1_1.5 | length 30.4
  Top Layer w0.635: R1_6.2 62.725,58.407 62.725,53.988 PT1_SDA.1 ; U1_1.5 81.26,53.024 81.788,52.496 v1(81.788,52.324)
  Bottom Layer w0.635: PT1_SDA.1 62.77,53.943 80.264,53.943 80.264,53.848 v1(81.788,52.324) v1@81.788,52.36
SWCLK: J1_9.6 U1_1.4 | length 28.3
  Top Layer w0.635: U1_1.4 80.01,39.751 86.321,33.44 86.956,33.44 J1_9.6
SWDIO: J1_9.4 U1_1.3 | length 31.1
  Top Layer w0.635: U1_1.3 78.76,38.842 86.702,30.9 86.956,30.9 J1_9.4
T_AIR: R1_25.2 R1_26.1 U1_1.21 | length 7.1
  Top Layer w0.635: R1_26.1 73.736,74.625 76.124,74.625 76.2,74.701 76.23,74.671 76.23,70.292 U1_1.21
T_EAU: R1_27.2 R1_28.1 U1_1.23 | length 35.8
  Top Layer w0.635: R1_27.2 R1_28.1 56.134,86.233 v1(61.087,81.28) ; v1(63.373,76.454) 63.373,74.723 71.334,66.762 U1_1.23
  Bottom Layer w0.635: v1(61.087,81.28) 63.373,78.994 v1(63.373,76.454)
Vbus: C1_5.2 R1_8.2 U1_5.A4 U1_5.A9 U1_5.B4 U1_5.B9 U1_7.1 U1_7.2 U1_7.6 | length 25.8
  Top Layer w0.254: 30.226,35.306 30.291,35.241 U1_5.A4 30.291,32.796 U1_5.B9@30.314,32.773 ; 32.766,35.306 32.791,35.281 U1_5.A9 32.766,33.861 32.766,32.894 32.768,32.892 ; R1_8.2 35.044,40.403 35.687,40.403 ; U1_7.2 37.084,40.157 37.084,40.403 35.687,40.403 ; U1_7.6 40.831,38.633 40.805,38.608 40.805,37.884 40.513,37.592 35.941,37.592 35.687,37.846 35.687,40.403
  Top Layer w0.635: 30.226,35.306 32.766,35.306 34.299,35.306 34.671,35.678 C1_5.2 R1_8.2
Vcpan: J1_2.3 R1_15.2 R1_16.2 R1_17.2 R1_24.1 | length 18.6
  Top Layer w0.635: R1_17.2@53.645,34.341 53.645,29.641 J1_2.3 54.361,29.565 55.53,30.734 R1_24.1 ; R1_17.2 R1_16.2 57.798,34.43 57.798,37.732 R1_15.2
Vpan: C1_10.2 J1_3.1 L1_2.1 | length 8.8
  Top Layer w0.635: J1_3.1 67.042,29.922 67.042,31.736 68.199,32.893 L1_2.1 C1_10.2
pads on no net: "U1_5.\"" J1_7.1 J1_7.3 J1_9.1 J1_9.3 J1_9.5 J1_9.7 J1_9.9 J1_9.10 U1_1.8 U1_1.9 U1_1.10 U1_1.11 U1_1.12 U1_1.13 U1_1.19 U1_1.24 U1_1.25 U1_1.26 U1_1.27 U1_1.28 U1_2.4 U1_3.5 U1_5. U1_5.A2 U1_5.A3 U1_5.A5 U1_5.A6 U1_5.A7 U1_5.A8 U1_5.A10 U1_5.A11 U1_5.B2 U1_5.B3 U1_5.B5 U1_5.B6 U1_5.B7 U1_5.B8 U1_5.B10 U1_5.B11 U1_5.S1 U1_5.S2 U1_5.S4 U1_6.1 U1_6.8 U1_7.3 U1_7.4 U1_7.7 U1_7.8 U1_7.9 U1_8.8

## Polygon pours and split planes (outlines as drawn)
GND on Bottom Layer "GND_L02_P001" (solid, pour order 1): 91.44,25.019 25.4,25.019 25.4,103.505 91.44,103.505
GND on Top Layer "GND_L01_P000" (solid, pour order 0): 25.4,25.019 25.4,103.505 91.44,103.505 91.44,25.019

## Silkscreen, mask and mechanical layers (free items; w line width, h text height)
Top Overlay:
  text "NeptuneSense" at 90.297,56.007 h1.52 r90
Bottom Overlay:
  text "POGU NAULEAU BONNEL" at 88.519,58.166 h1.52
Mechanical 1:
  lines w0.254: 67.437,102.87 72.009,102.87
Mechanical 15:
  the board outline again, w0.381

## Text inside footprints (layer, text, board x,y; h text height)
D1_4: Top Overlay "C" at 73.163,48.3 h0.76; Top Overlay "A" at 73.163,50.3 h0.76
D1_6: Top Overlay "A" at 61.253,26.786 h1 r270; Top Overlay "C" at 59.253,26.786 h1 r270
D1_7: Top Overlay "A" at 39.889,28.583 h0.76; Top Overlay "C" at 39.889,26.583 h0.76
J1_4: Mechanical 13 "PCB EDGE" at 90.805,95.631 h0.61 r90
J1_9: Top Overlay "2" at 87.503,25.654 h0.76 r90; Top Overlay "1" at 90.17,25.908 h0.76 r90; Top Overlay "9" at 90.043,40.259 h0.76 r90; Top Overlay "10" at 87.503,40.259 h0.76 r90